# Altium PCB LASERDIODE_FIX.PcbDoc (part 2 of 4)
Units mm, origin at the board's own origin, x right, y up, seen from the top; angles counter-clockwise.
Board outline 85 x 85 mm, 4 copper layers (Top Layer, Mid-Layer 1, Mid-Layer 2, Bottom Layer); 546 components, 363 nets, 1494 pads, 1079 vias.
Unrouted connection lines stored in the file: 1020.
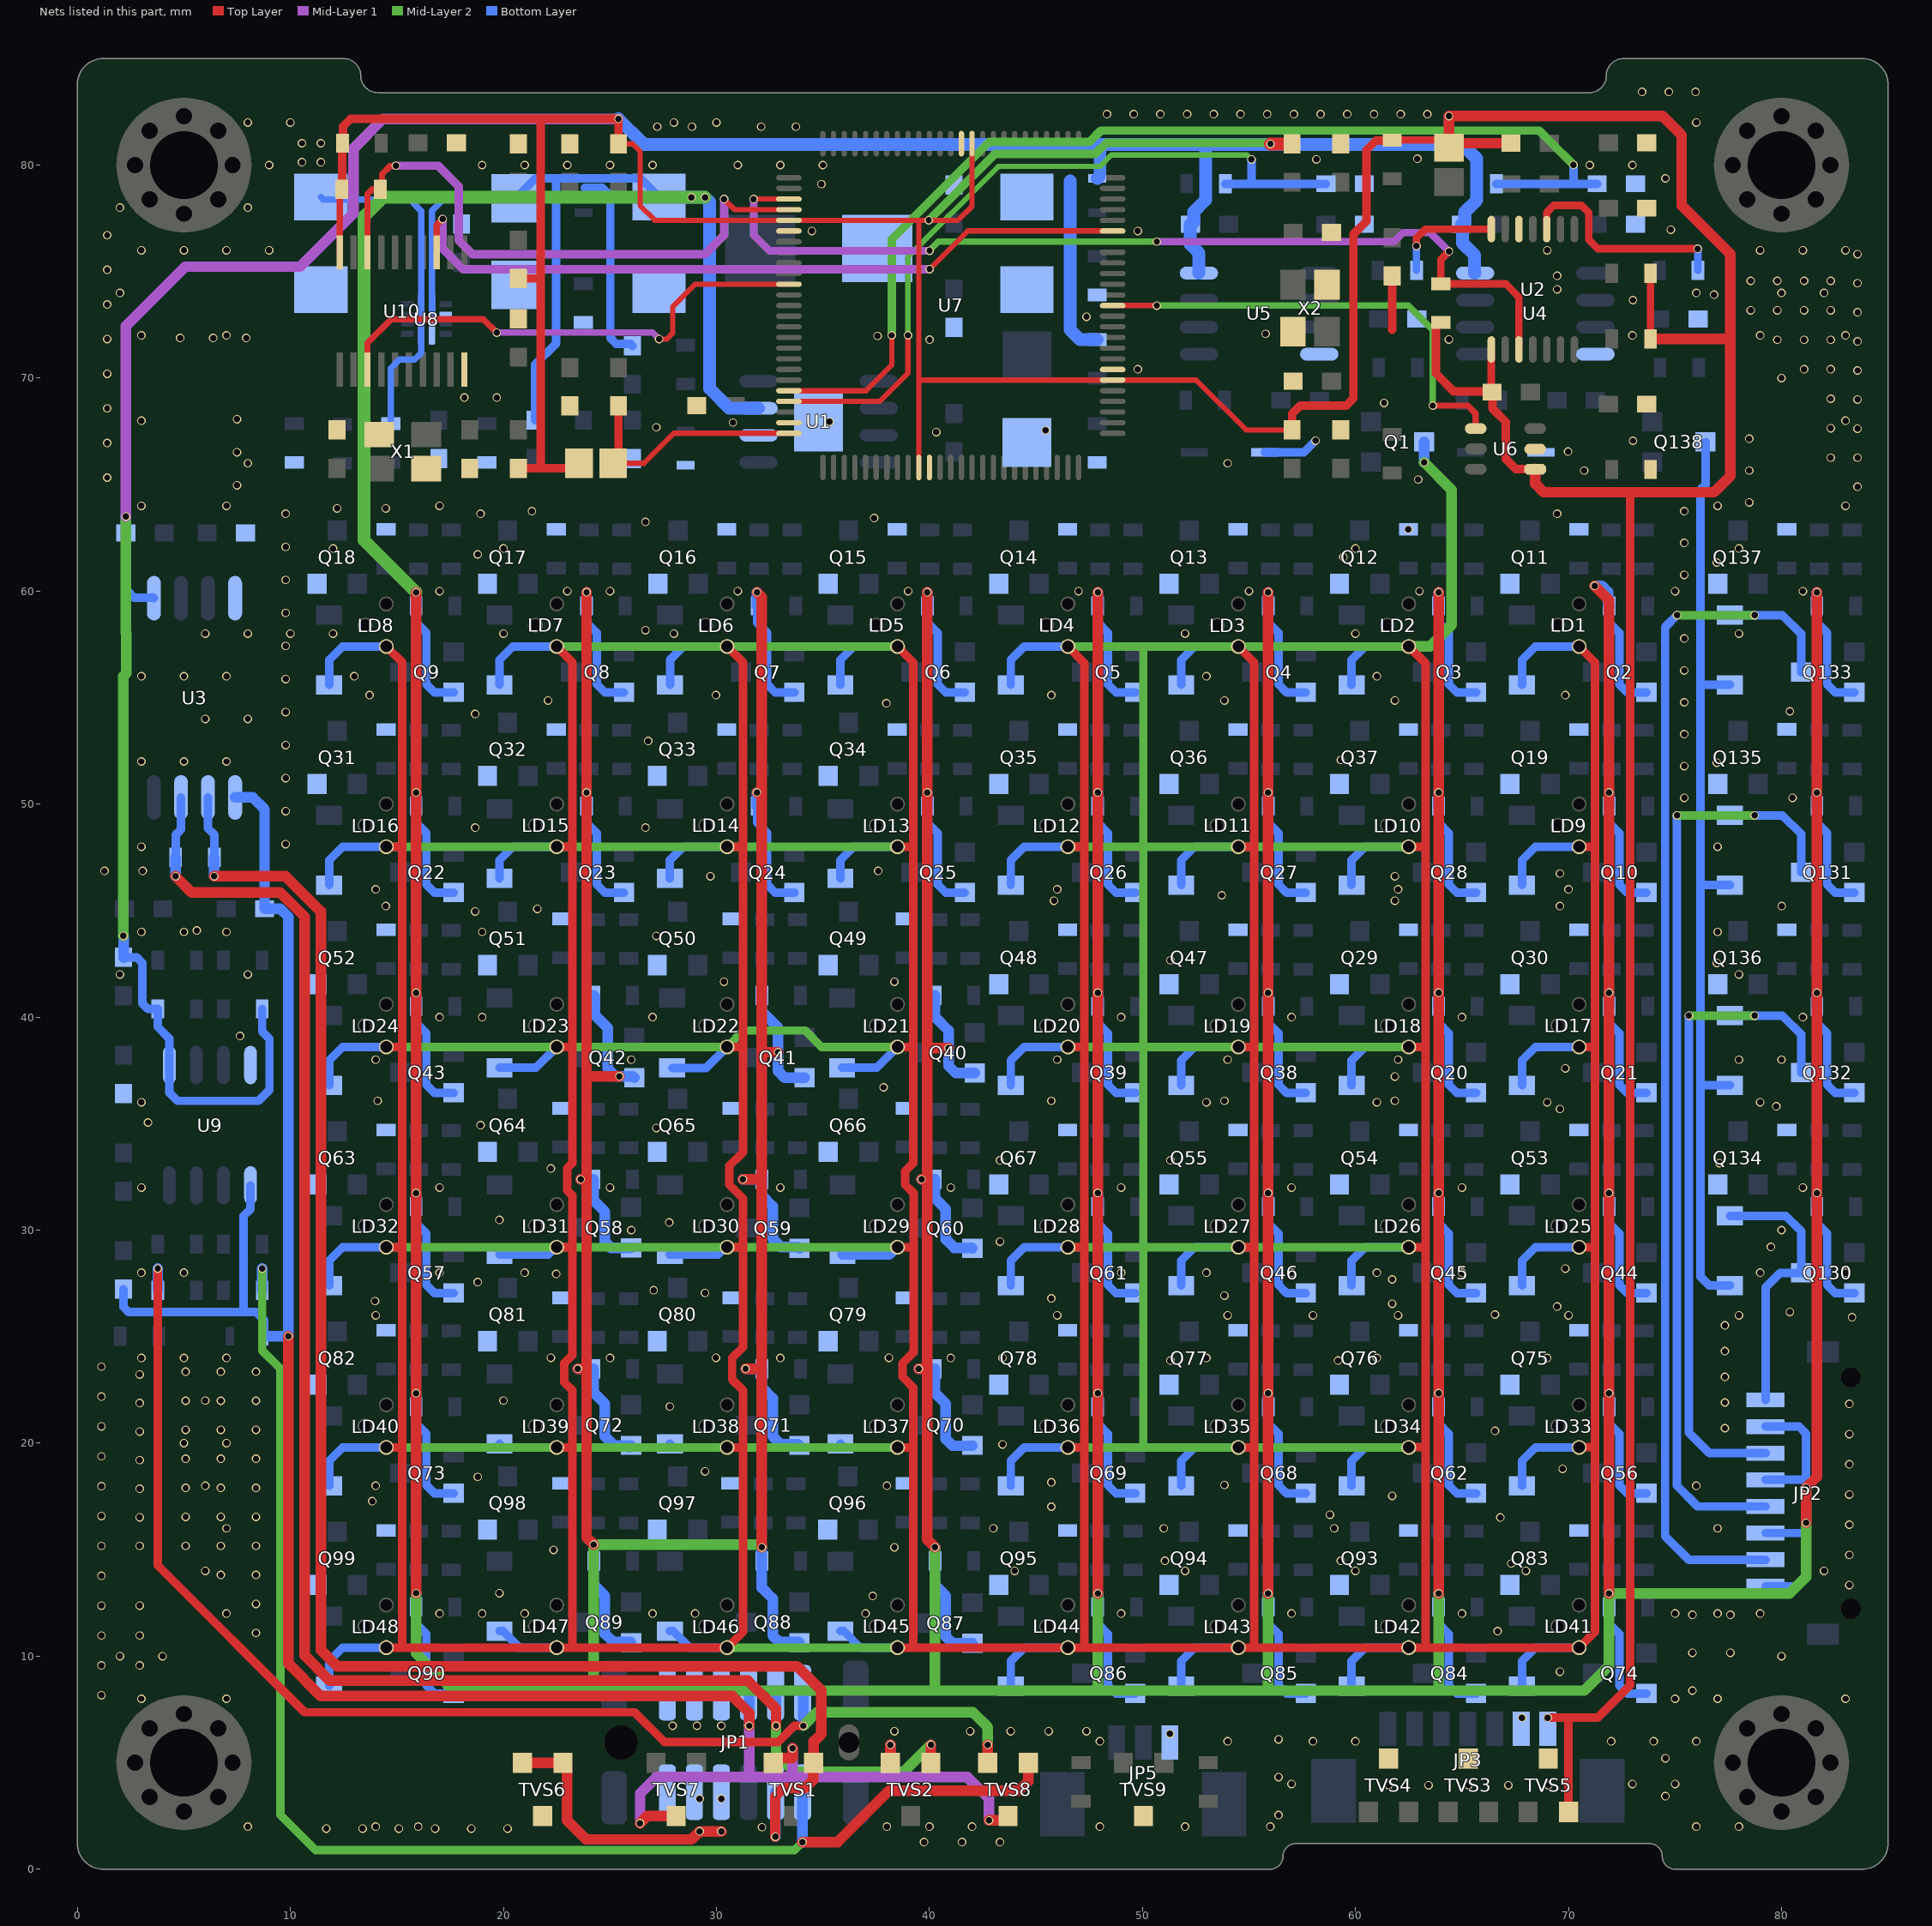
[diagram p4: the nets of this part, all layers, seen from the top]

## Part data
C1 C3 C4 C5 C6 C7 C8 C9 C12 C14 C15 C16 C18 C19 C20 C21 C22 C23 C24 C25 C26 C27 C28 C29 C30 C32 C33 C34 C35 C37 C38 C39 C40 C41 C42 C43 C44 C45 C46 C47 C48 C49 C50 C52 C53 C55 C57 C58 C60 C63 C64 C68: library part CM, "0603"
C2 C10 C11: library part CN_TANT
D1 D2: library part "Diode SMD", "DIODE SCHOTTKY 40V 5A SMA", Code - JEDEC=DO-214-AB, Published=8-Jun-2000, Publisher="Altium Limited", Revision="July-2002: Re-released for DXP Platform."
DIO1 DIO2 DIO3 DIO4 DIO5 DIO6 DIO7 DIO8 DIO9 DIO10 DIO11 DIO12 DIO13 DIO14 DIO15 DIO16 DIO17 DIO18 DIO19 DIO20 DIO21 DIO22 DIO23 DIO24 DIO25 DIO26 DIO27 DIO28 DIO29 DIO30 DIO31 DIO32 DIO33 DIO34 DIO35 DIO36 DIO37 DIO38 DIO39 DIO40 DIO41 DIO42 DIO43 DIO44 DIO45 DIO46 DIO47 DIO48 DIO65 DIO66 DIO67 DIO68: "Default Diode", Code - JEDEC=DO-214-AB, Published=8-Jun-2000, Publisher="Altium Limited", Revision="July-2002: Re-released for DXP Platform."
JP1: "WR-PHD 2.54 mm Dual Socket Header", Manufacturer="W¨¹rth Elektronik eiSos GmbH", partNo=61301221821, ComponentLink1 Description=Manufacturer, ComponentLink1URL=http://www.we-online.com, ComponentLink2 Description=Datasheet, ComponentLink2URL=http://katalog.we-online.de/em/datasheet/6130xx21821.pdf, Created by="Karrer Zheng", Created Date="29 March 2013", NoPins=12
JP2: library part JP8, "WR-PHD 2.54 mm Angled Socket Header", Manufacturer="W¨¹rth Elektronik eiSos GmbH", partNo=613008143121, ComponentLink1 Description=Manufacturer, ComponentLink1URL=http://www.we-online.com, ComponentLink2 Description=Datasheet, ComponentLink2URL=http://katalog.we-online.de/em/datasheet/6130xx143121.pdf, Created by="Karrer Zheng", Created Date="29 March 2013", NoPins=08
JP3: library part JP7, "WR-PHD 2.54 mm Angled Socket Header", Manufacturer="W¨¹rth Elektronik eiSos GmbH", partNo=613007143121, ComponentLink1 Description=Manufacturer, ComponentLink1URL=http://www.we-online.com, ComponentLink2 Description=Datasheet, ComponentLink2URL=http://katalog.we-online.de/em/datasheet/6130xx143121.pdf, Created by="Karrer Zheng", Created Date="29 March 2013", NoPins=07
JP5: library part JP3, "WR-PHD 2.54 mm Angled Socket Header", Manufacturer="W¨¹rth Elektronik eiSos GmbH", partNo=613003143121, ComponentLink1 Description=Manufacturer, ComponentLink1URL=http://www.we-online.com, ComponentLink2 Description=Datasheet, ComponentLink2URL=http://katalog.we-online.de/em/datasheet/6130xx143121.pdf, Created by="Karrer Zheng", Created Date="29 March 2013", NoPins=03
L1: library part INDUCTOR, "SRP7050TA-150M"
L2 L3: library part Inductor, "MLZ1608N100LT000"
LD1 LD2 LD3 LD4 LD5 LD6 LD7 LD8 LD9 LD10 LD11 LD12 LD13 LD14 LD15 LD16 LD17 LD18 LD19 LD20 LD21 LD22 LD23 LD24 LD25 LD26 LD27 LD28 LD29 LD30 LD31 LD32 LD33 LD34 LD35 LD36 LD37 LD38 LD39 LD40 LD41 LD42 LD43 LD44 LD45 LD46 LD47 LD48: library part LD
LED1 LED2 LED3 LED4: library part "LED SMD"
Q1 Q138: library part FET-N
Q2 Q3 Q4 Q5 Q6 Q7 Q8 Q9 Q10 Q20 Q21 Q22 Q23 Q24 Q25 Q26 Q27 Q28 Q38 Q39 Q40 Q41 Q42 Q43 Q44 Q45 Q46 Q56 Q57 Q58 Q59 Q60 Q61 Q62 Q68 Q69 Q70 Q71 Q72 Q73 Q74 Q84 Q85 Q86 Q87 Q88 Q89 Q90 Q130 Q131 Q132 Q133: library part FET-P
Q11 Q12 Q13 Q14 Q15 Q16 Q17 Q18 Q19 Q29 Q30 Q31 Q32 Q33 Q34 Q35 Q36 Q37 Q47 Q48 Q49 Q50 Q51 Q52 Q53 Q54 Q55 Q63 Q64 Q65 Q66 Q67 Q75 Q76 Q77 Q78 Q79 Q80 Q81 Q82 Q83 Q93 Q94 Q95 Q96 Q97 Q98 Q99 Q134 Q135 Q136 Q137: library part 2SC1815, "SOT23-3"
R1 R2 R3 R4 R5 R6 R8 R9 R10 R11 R12 R13 R14 R15 R16 R18 R19 R20 R21 R22 R23 R24 R25 R26 R27 R28 R29 R30 R31 R32 R33 R34 R35 R36 R37 R38 R39 R40 R41 R42 R43 R44 R45 R46 R47 R48 R49 R50 R51 R52 R53 R54 R55 R56 R57 R58 R59 R60 R61 R62 R63 R64 R65 R66 R67 R68 R69 R70 R71 R72 R73 R74 R75 R76 R77 R78 R79 R80 R81 R82 R83 R84 R85 R86 R87 R88 R89 R90 R91 R92 R93 R94 R95 R96 R97 R98 R99 R100 R101 R102 R103 R104 R105 R106 R107 R108 R109 R110 R111 R112 R113 R114 R115 R116 R117 R118 R119 R120 R121 R122 R123 R124 R125 R126 R127 R128 R129 R130 R131 R132 R133 R134 R135 R136 R137 R138 R139 R140 R141 R142 R143 R144 R145 R146 R147 R148 R149 R150 R151 R152 R153 R154 R155 R156 R157 R158 R159 R160 R161 R162 R163 R164 R165 R166 R167 R168 R169 R170 R171 R172 R173 R174 R175 R176 R177 R178 R179 R180 R181 R182 R183 R184 R185 R186 R187 R188 R189 R190 R191 R192 R193 R194 R195 R196 R197 R198 R201 R202 R203 R204 R205 R206 R207 R210 R211 R212 R213 R214 R215 R216 R217 R218 R275 R276 R277 R278 R279 R280 R282 R283 R284 R285 R286 R287 R288 R289 R290 R296 R297 R298 R299 R303 R304 R305 R306 R308 R309 R310 R311 R312 R313 R314 R316 R319 R322: library part Res-SMD, "0603", Manufacturer="Generic Components", Class=Passive, Published=08/06/2000, Publisher="Altium Hobart Technology Centre"
R7: library part Res-SMD, "ERA-3AEB3241V", Manufacturer="Generic Components", Class=Passive, Published=08/06/2000, Publisher="Altium Hobart Technology Centre"
R17: library part Res-SMD, "1206", Manufacturer="Generic Components", Class=Passive, Published=08/06/2000, Publisher="Altium Hobart Technology Centre"
TVS1 TVS2 TVS6: library part S2315, "TVS DIODE 12VWM 19VC SOT23, P/N:  S2312"
TVS3 TVS4 TVS5 TVS7 TVS8 TVS9: library part S2303, "TVS DIODE 5VWM 10.8VC SOT23, P/N:   / S2305"
U1: library part TPS543X, "8SOP"
U2: library part MCP4902, "IC DAC 8BIT V-OUT 14TSSOP"
U3: library part ISO1042, "IC TXRX/ISO FULL 1/1 8SOIC"
U4 U5: library part LM358, "8SOIC"
U6: "TSOT23-6"
U7: "8-bit AVR Microcontroller, 4.5-5.5V, 256KB Flash, 4KB EEPROM, 8KB SRAM, 86 GPIO pins, 100-pin TQFP, Industrial Grade (-40°C to 85°C), Pb-Free", Supplier Part Number 1=ATMEGA2560-16AUR-ND, Supplier 1=Digi-Key
U8: library part TPS259470, "P/N: TPS259470LRPWR"
U10: "IC CAN CONTROLLER W/SPI 20TSSOP, P/N:   / MCP2515-I/ST"
X1 X2: library part XT4, "ECS-80-8-33Q-ADS"

## Via types
v1: diameter 0.4, hole 0.3, Top Layer to Bottom Layer, tented both sides, 1079 vias

## Nets (pads, with @x,y where several pads share a name; then routed paths per layer and width w, separated by ;. In a path a pad name is that pad's centre, name@x,y a point inside that pad or via, vN(x,y) a via of type N, cw(c..) or ccw(c..) an arc to the next point about the centre after c; other vN are vias at no path point)
+5: C9.1 C11.1 C14.1 C20.2 C22.1 C27.2 C30.2 C33.2 C38.1 C39.1 C44.1 C45.1 C53.2 JP3.1 L1.2 L2.2 L3.2 LED1.1 R5.2 R185.1 R218.1 R284.1 R285.1 R288.1 R310.2 R312.2 R316.1 TVS5.3 U2.1 U3.1 U4.8 U5.8 U6.1 U7.10 U7.31 U7.61 U7.80 U9.1 U10.20 | length 404.9
  Top Layer w0.25: C38.1@25.4,80.993 26.068,80.993 26.416,80.645 26.416,78.105 27.115,77.406 U7.80@33.4,77.406 39.497,77.406 ; U7.10@39.5,65.806 39.5,69.85 ; U7.61@42,81.006 42,78.068 41.338,77.406 v1(39.964,77.406) 39.497,77.406 ; C39.1@57.023,67.564 54.864,67.564 52.522,69.906 U7.31@48.6,69.906 39.556,69.906 39.5,69.85 ; 39.497,77.406 39.5,77.403 39.5,69.85
  Top Layer w0.3: U10.20@12.315,75.902 12.315,78.774 R312.2@12.408,78.867 R312.2@12.427,78.886
  Top Layer w0.35: R288.1@12.427,81.007 R288.1@12.446,81.026 ; L2.2@23.313,65.764 L2.2@23.55,66.001 ; R316.1@61.722,81.173 64.026,81.173 L3.2@64.389,80.81 ; U2.1@66.376,71.343 66.376,69.376 C20.2@66.421,69.331 ; R185.1@73.851,71.844 R218.1@73.851,74.911
  Top Layer w0.4: R312.2@12.427,78.886 R288.1@12.427,81.007 ; R288.1@12.446,81.026 12.464,81.044 12.464,81.806 12.827,82.169 21.748,82.169 ; C45.1@20.701,65.764 21.748,65.764 ; C53.2@20.901,74.47 20.701,74.67 C53.2@20.701,74.676 21.717,74.676 ; L2.2@23.313,65.764 21.748,65.764 ; C38.1@25.4,80.993 v1(25.4,82.169) 21.748,82.169 ; C39.1@57.023,67.564 57.023,68.326 57.404,68.707 59.563,68.707 59.902,69.046 59.902,76.751 60.511,77.36 60.511,80.704 60.952,81.145 61.694,81.145 R316.1@61.722,81.173 ; R310.2@64.008,72.606 63.87,72.606 63.77,72.506 63.77,70.215 64.609,69.376 C20.2@66.376,69.376 ; C20.2@66.421,69.331 66.425,69.327 66.425,68.576 67.056,67.945 67.056,66.2 67.519,65.736 U6.1@68.427,65.736 ; v1(69.028,7.112) 71.374,7.112 72.898,8.636 72.898,64.643 ; TVS5.3@70.002,2.687 70.002,7.112 ; 21.748,65.764 21.748,82.169
  Top Layer w0.5: L3.2@64.389,80.81 v1(64.389,82.296) 74.422,82.296 75.311,81.407 75.311,78.105 77.597,75.819 77.597,65.405 76.835,64.643 74.523,64.643 72.898,64.643 68.834,64.643 68.438,65.039 U6.1@68.438,65.725 U6.1@68.427,65.736 ; L3.2@64.605,81.026 C30.2@67.299,81.026 ; R185.1@73.851,71.844 77.597,71.844
  Top Layer w0.6: v1(56.007,80.993) C44.1@57.023,80.993
  Mid-Layer 1 w0.5: v1(2.275,63.5) 2.275,72.451 5.055,75.231 10.461,75.231 12.954,77.724 12.954,80.772 14.351,82.169 v1(25.4,82.169)
  Mid-Layer 2 w0.4: v1(39.964,77.406) 43.076,80.518 47.782,80.518 48.315,81.051 55.949,81.051 v1(56.007,80.993)
  Mid-Layer 2 w0.5: v1(2.159,43.815) 2.159,56.007 2.286,56.134 2.286,58.039 2.275,58.05 v1(2.275,63.5)
  Bottom Layer w0.4: C14.1@2.159,42.805 2.165,42.799 2.794,42.799 3.048,42.545 3.048,40.64 3.302,40.386 R285.1@3.772,40.386 3.772,39.535 4.318,38.989 U9.1@4.318,37.75 4.318,36.449 4.699,36.068 8.509,36.068 9.017,36.576 9.017,38.978 8.674,39.321 R284.1@8.674,40.386 ; C22.1@2.275,62.736 2.275,60.082 2.667,59.69 3.569,59.69 U3.1@3.593,59.666
  Bottom Layer w0.5: v1(2.159,43.815) 2.165,43.809 C14.1@2.165,42.799 ; C22.1@2.275,62.736 v1(2.275,63.5) ; LED1.1@47.879,79.372 47.956,79.372 48.006,79.422 48.006,79.629 ; 64.389,80.963 v1(64.389,82.296)
  Bottom Layer w0.6: v1(25.4,82.169) 26.606,80.963 48.004,80.963 ; 46.609,79.248 46.609,72.263 47.065,71.807 R5.2@47.874,71.807 ; LED1.1@47.879,79.372 LED1.1@47.904,79.372 ; 48.004,80.518 48.004,80.963 ; 48.006,79.629 48.006,80.518 ; U5.8@52.649,74.93 52.649,75.875 52.241,76.283 52.241,77.206 C33.2@52.25,77.216 52.3,77.216 52.4,77.316 52.4,77.8 52.959,78.359 52.959,80.899 ; U4.8@65.615,74.93 65.584,74.93 65.584,75.779 65.024,76.339 65.024,77.17 C27.2@64.978,77.216 65.028,77.216 65.128,77.316 65.128,77.783 65.687,78.342 65.687,80.3 65.024,80.963 64.389,80.963 48.004,80.963
+12: C1.2 C6.1 C10.1 D1.2 JP2.1 JP2.3 JP2.5 JP2.7 LED3.1 Q2.3 Q3.3 Q4.3 Q5.3 Q6.3 Q7.3 Q8.3 Q9.3 Q10.3 Q20.3 Q21.3 Q22.3 Q23.3 Q24.3 Q25.3 Q26.3 Q27.3 Q28.3 Q38.3 Q39.3 Q40.3 Q41.3 Q42.3 Q43.3 Q44.3 Q45.3 Q46.3 Q56.3 Q57.3 Q58.3 Q59.3 Q60.3 Q61.3 Q62.3 Q68.3 Q69.3 Q70.3 Q71.3 Q72.3 Q73.3 Q74.3 Q84.3 Q85.3 Q86.3 Q87.3 Q88.3 Q89.3 Q90.3 Q130.3 Q131.3 Q132.3 Q133.3 R8.1 R9.1 R10.1 R11.1 R18.1 R19.1 R20.1 R21.1 R22.1 R23.1 R24.1 R25.1 R26.1 R45.1 R46.1 R47.1 R48.1 R49.1 R50.1 R51.1 R52.1 R53.1 R72.1 R73.1 R74.1 R75.1 R76.1 R77.1 R78.1 R79.1 R80.1 R100.1 R101.1 R102.1 R103.1 R104.1 R147.1 R148.1 R149.1 R150.1 R151.1 R152.1 R153.1 R154.1 R155.1 R183.1 R184.1 R186.1 R188.1 R189.1 R190.1 R191.1 U1.7 U8.6 | length 938.7
  Top Layer w0.5: v1(15.901,12.954) v1(15.901,22.344) v1(15.901,31.744) v1(15.901,41.144) v1(15.901,50.544) v1(15.901,59.944) ; v1(23.495,23.495) 23.774,23.495 23.901,23.368 ; v1(23.622,32.385) 23.774,32.385 23.901,32.512 ; v1(23.901,59.944) v1(23.901,50.544) 23.901,37.211 ; v1(24.236,15.24) 23.901,15.575 23.901,23.368 ; v1(25.445,37.222) 23.912,37.222 23.901,37.211 ; v1(31.242,32.385) 32.131,32.385 ; v1(31.369,23.495) 32.131,23.495 ; v1(31.901,50.544) 32.129,50.544 32.131,50.546 ; v1(31.901,59.944) 32.131,59.714 32.131,50.546 ; v1(32.131,15.113) 32.131,23.495 ; v1(32.893,38.354) 32.131,38.354 ; v1(39.497,23.495) 39.901,23.495 ; v1(39.624,32.385) 39.901,32.385 ; v1(39.901,59.944) v1(39.901,50.544) 39.901,38.481 ; v1(40.259,15.113) 39.901,15.471 39.901,23.495 ; v1(40.894,38.544) 39.964,38.544 39.901,38.481 ; v1(47.901,12.944) v1(47.901,22.344) v1(47.901,31.744) v1(47.901,41.144) v1(47.901,50.544) v1(47.901,59.944) ; v1(55.901,12.944) v1(55.901,22.344) v1(55.901,31.744) v1(55.901,41.144) v1(55.901,50.544) v1(55.901,59.944) ; v1(63.901,12.944) v1(63.901,22.344) v1(63.901,31.744) v1(63.901,41.144) v1(63.901,50.544) v1(63.901,59.944) ; v1(71.227,60.25) 71.901,59.576 v1(71.901,50.544) v1(71.901,41.144) v1(71.901,31.744) v1(71.901,22.344) v1(71.901,12.944) ; v1(81.153,16.256) v1(81.153,17.907) 81.661,18.415 v1(81.661,41.144) v1(81.661,59.944) ; 23.901,23.368 23.901,32.512 ; 23.901,32.512 23.901,37.211 ; 32.131,23.495 32.131,32.385 ; 32.131,32.385 32.131,38.354 ; 32.131,38.354 32.131,50.546 ; 39.901,23.495 39.901,32.385 ; 39.901,32.385 39.901,38.481
  Mid-Layer 2 w0.5: v1(15.901,12.954) 15.901,10.134 17.653,8.382 24.257,8.382 ; v1(32.131,15.113) 32.004,15.24 v1(24.236,15.24) 24.236,8.403 24.257,8.382 ; v1(40.259,15.113) 40.259,8.382 ; v1(47.901,12.944) 47.901,8.404 47.879,8.382 ; v1(55.901,12.944) 55.901,8.403 55.88,8.382 ; v1(63.901,12.944) 63.901,8.489 64.008,8.382 ; v1(81.153,17.907) v1(81.153,16.256) 81.153,13.716 80.381,12.944 v1(71.901,12.944) 71.901,9.544 70.739,8.382 64.008,8.382 ; 24.257,8.382 40.259,8.382 ; 40.259,8.382 47.879,8.382 ; 47.879,8.382 55.88,8.382 ; 55.88,8.382 64.008,8.382
  Mid-Layer 2 w0.6: v1(15.901,59.944) 13.462,62.383 13.462,77.597 14.351,78.486 v1(28.829,78.486) v1(29.464,78.486)
  Bottom Layer w0.3: U8.6@16.637,72.771 16.637,77.851 17.223,78.437 D1.2@20.574,78.437
  Bottom Layer w0.4: R186.1@15.906,12.304 15.906,11.516 16.383,11.039 16.383,8.626 16.764,8.245 Q90.3@17.66,8.245 ; R150.1@15.906,21.704 15.906,20.916 16.383,20.439 16.383,18.026 16.764,17.645 Q73.3@17.66,17.645 ; R100.1@15.906,31.104 15.906,30.316 16.383,29.839 16.383,27.426 16.764,27.045 Q57.3@17.66,27.045 ; R77.1@15.906,40.504 15.906,39.716 16.383,39.239 16.383,36.826 16.764,36.445 Q43.3@17.66,36.445 ; R47.1@15.906,49.904 15.906,49.116 16.383,48.639 16.383,46.226 16.764,45.845 Q22.3@17.66,45.845 ; R25.1@15.906,59.304 15.906,58.516 16.383,58.039 16.383,55.626 16.764,55.245 Q9.3@17.66,55.245 ; D1.2@20.574,78.437 21.509,79.372 LED3.1@23.754,79.372 26.432,79.372 C10.1@27.305,78.499 ; C1.2@21.488,68.02 21.488,70.637 22.479,71.628 22.479,79.219 ; 23.812,78.93 24.647,78.93 25.019,78.559 25.019,71.882 25.295,71.606 25.966,71.606 C6.1@26.06,71.512 ; R48.1@23.906,49.904 23.906,49.116 24.383,48.639 24.383,46.226 24.764,45.845 Q23.3@25.66,45.845 ; R24.1@23.906,59.304 23.906,58.516 24.383,58.039 24.383,55.626 24.764,55.245 Q8.3@25.66,55.245 ; R49.1@31.906,49.904 31.906,49.116 32.383,48.639 32.383,46.226 32.764,45.845 Q24.3@33.66,45.845 ; R23.1@31.906,59.304 31.906,58.516 32.383,58.039 32.383,55.626 32.764,55.245 Q7.3@33.66,55.245 ; R50.1@39.906,49.904 39.906,49.116 40.383,48.639 40.383,46.226 40.764,45.845 Q25.3@41.66,45.845 ; R22.1@39.906,59.304 39.906,58.516 40.383,58.039 40.383,55.626 40.764,55.245 Q6.3@41.66,55.245 ; R191.1@47.906,12.304 47.906,11.516 48.383,11.039 48.383,8.626 48.764,8.245 Q86.3@49.66,8.245 ; R153.1@47.906,21.704 47.906,20.916 48.383,20.439 48.383,18.026 48.764,17.645 Q69.3@49.66,17.645 ; R104.1@47.906,31.104 47.906,30.316 48.383,29.839 48.383,27.426 48.764,27.045 Q61.3@49.66,27.045 ; R73.1@47.906,40.504 47.906,39.716 48.383,39.239 48.383,36.826 48.764,36.445 Q39.3@49.66,36.445 ; R51.1@47.906,49.904 47.906,49.116 48.383,48.639 48.383,46.226 48.764,45.845 Q26.3@49.66,45.845 ; R21.1@47.906,59.304 47.906,58.516 48.383,58.039 48.383,55.626 48.764,55.245 Q5.3@49.66,55.245 ; R188.1@55.906,12.304 55.906,11.516 56.383,11.039 56.383,8.626 56.764,8.245 Q85.3@57.66,8.245 ; R148.1@55.906,21.704 55.906,20.916 56.383,20.439 56.383,18.026 56.764,17.645 Q68.3@57.66,17.645 ; R80.1@55.906,31.104 55.906,30.316 56.383,29.839 56.383,27.426 56.764,27.045 Q46.3@57.66,27.045 ; R72.1@55.906,40.504 55.906,39.716 56.383,39.239 56.383,36.826 56.764,36.445 Q38.3@57.66,36.445 ; R52.1@55.906,49.904 55.906,49.116 56.383,48.639 56.383,46.226 56.764,45.845 Q27.3@57.66,45.845 ; R20.1@55.906,59.304 55.906,58.516 56.383,58.039 56.383,55.626 56.764,55.245 Q4.3@57.66,55.245 ; R190.1@63.906,12.304 63.906,11.516 64.383,11.039 64.383,8.626 64.764,8.245 Q84.3@65.66,8.245 ; R152.1@63.906,21.704 63.906,20.916 64.383,20.439 64.383,18.026 64.764,17.645 Q62.3@65.66,17.645 ; R79.1@63.906,31.104 63.906,30.316 64.383,29.839 64.383,27.426 64.764,27.045 Q45.3@65.66,27.045 ; R45.1@63.906,40.504 63.906,39.716 64.383,39.239 64.383,36.826 64.764,36.445 Q20.3@65.66,36.445 ; R53.1@63.906,49.904 63.906,49.116 64.383,48.639 64.383,46.226 64.764,45.845 Q28.3@65.66,45.845 ; R19.1@63.906,59.304 63.906,58.516 64.383,58.039 64.383,55.626 64.764,55.245 Q3.3@65.66,55.245 ; R155.1@71.906,12.304 71.906,11.516 72.383,11.039 72.383,8.626 72.764,8.245 Q74.3@73.66,8.245 ; R147.1@71.906,21.704 71.906,20.916 72.383,20.439 72.383,18.026 72.764,17.645 Q56.3@73.66,17.645 ; R78.1@71.906,31.104 71.906,30.316 72.383,29.839 72.383,27.426 72.764,27.045 Q44.3@73.66,27.045 ; R46.1@71.906,40.504 71.906,39.716 72.383,39.239 72.383,36.826 72.764,36.445 Q21.3@73.66,36.445 ; R26.1@71.906,49.904 71.906,49.116 72.383,48.639 72.383,46.226 72.764,45.845 Q10.3@73.66,45.845 ; R18.1@71.906,59.304 71.906,58.516 72.383,58.039 72.383,55.626 72.764,55.245 Q2.3@73.66,55.245 ; JP2.1@79.247,13.278 80.715,13.278 81.153,13.716 81.153,15.875 ; JP2.3@79.247,15.778 81.056,15.778 81.153,15.875 ; JP2.5@79.247,18.278 81.036,18.278 81.153,18.161 ; JP2.7@79.247,20.778 80.822,20.778 81.153,20.447 81.153,18.161 ; R11.1@81.666,31.104 81.666,30.316 82.143,29.839 82.143,27.426 82.524,27.045 Q130.3@83.42,27.045 ; R8.1@81.666,40.504 81.666,39.716 82.143,39.239 82.143,36.826 82.524,36.445 Q132.3@83.42,36.445 ; R10.1@81.666,49.905 81.666,49.117 82.143,48.64 82.143,46.227 82.524,45.846 Q131.3@83.42,45.846 ; R9.1@81.666,59.304 81.666,58.516 82.143,58.039 82.143,55.626 82.524,55.245 Q133.3@83.42,55.245 ; 81.153,15.875 v1(81.153,16.256) v1(81.153,17.907) 81.153,18.161
  Bottom Layer w0.5: v1(15.901,12.954) R186.1@15.901,12.309 R186.1@15.906,12.304 ; v1(15.901,22.344) R150.1@15.901,21.709 R150.1@15.906,21.704 ; v1(15.901,31.744) R100.1@15.901,31.109 R100.1@15.906,31.104 ; v1(15.901,41.144) R77.1@15.901,40.509 R77.1@15.906,40.504 ; v1(15.901,50.544) R47.1@15.901,49.909 R47.1@15.906,49.904 ; v1(15.901,59.944) R25.1@15.901,59.309 R25.1@15.906,59.304 ; v1(23.495,23.495) R154.1@24.236,23.495 24.236,22.373 24.765,21.844 24.765,20.32 25.192,19.893 Q72.3@25.995,19.893 Q72.3@25.914,19.812 ; v1(23.622,32.385) R101.1@24.236,32.385 24.236,31.39 24.765,30.861 24.765,29.464 25.059,29.17 Q58.3@25.995,29.17 ; v1(23.901,50.544) R48.1@23.901,49.909 R48.1@23.906,49.904 ; v1(23.901,59.944) R24.1@23.901,59.309 R24.1@23.906,59.304 ; v1(24.236,15.24) R184.1@24.236,14.478 24.236,13.356 24.765,12.827 24.765,11.049 25.146,10.668 25.964,10.668 Q89.3@25.995,10.637 ; R76.1@24.236,41.021 24.286,40.971 24.286,40.103 24.892,39.497 24.892,37.592 25.273,37.211 26.091,37.211 Q42.3@26.148,37.155 ; v1(31.242,32.385) R102.1@32.131,32.385 32.131,31.623 32.639,31.115 32.639,29.591 33.02,29.21 33.828,29.21 Q59.3@33.889,29.149 ; v1(31.369,23.495) R149.1@32.131,23.495 32.131,22.606 32.639,22.098 32.639,20.32 33.02,19.939 33.843,19.939 Q71.3@33.889,19.893 ; v1(31.901,50.544) R49.1@31.901,49.909 R49.1@31.906,49.904 ; v1(31.901,59.944) R23.1@31.901,59.309 R23.1@31.906,59.304 ; v1(32.131,15.113) R189.1@32.131,14.478 32.131,13.208 32.639,12.7 32.639,10.961 32.932,10.668 33.858,10.668 Q88.3@33.889,10.637 ; R75.1@32.131,41.021 32.131,40.259 32.893,39.497 v1(32.893,38.354) 32.893,37.465 33.208,37.15 Q41.3@34.143,37.15 ; v1(39.497,23.495) R151.1@40.258,23.495 40.258,22.353 40.767,21.844 40.767,20.193 41.085,19.875 41.999,19.875 Q70.3@42.017,19.893 ; v1(39.624,32.385) R103.1@40.258,32.385 40.258,31.497 40.767,30.988 40.767,29.572 41.167,29.173 41.993,29.173 Q60.3@42.017,29.149 ; v1(39.901,50.544) R50.1@39.901,49.909 R50.1@39.906,49.904 ; v1(39.901,59.944) R22.1@39.901,59.309 R22.1@39.906,59.304 ; R74.1@40.258,41.021 40.258,40.006 40.894,39.37 v1(40.894,38.544) 40.894,37.719 41.243,37.37 Q40.3@42.125,37.37 ; v1(40.259,15.113) 40.259,14.479 R183.1@40.258,14.478 40.258,13.336 40.767,12.827 40.767,10.922 41.085,10.604 42.014,10.604 Q87.3@42.017,10.607 ; v1(47.901,12.944) R191.1@47.901,12.309 R191.1@47.906,12.304 ; v1(47.901,22.344) R153.1@47.901,21.709 R153.1@47.906,21.704 ; v1(47.901,31.744) R104.1@47.901,31.109 R104.1@47.906,31.104 ; v1(47.901,41.144) R73.1@47.901,40.509 R73.1@47.906,40.504 ; v1(47.901,50.544) R51.1@47.901,49.909 R51.1@47.906,49.904 ; v1(47.901,59.944) R21.1@47.901,59.309 R21.1@47.906,59.304 ; v1(55.901,12.944) R188.1@55.901,12.309 R188.1@55.906,12.304 ; v1(55.901,22.344) R148.1@55.901,21.709 R148.1@55.906,21.704 ; v1(55.901,31.744) R80.1@55.901,31.109 R80.1@55.906,31.104 ; v1(55.901,41.144) R72.1@55.901,40.509 R72.1@55.906,40.504 ; v1(55.901,50.544) R52.1@55.901,49.909 R52.1@55.906,49.904 ; v1(55.901,59.944) R20.1@55.901,59.309 R20.1@55.906,59.304 ; v1(63.901,12.944) R190.1@63.901,12.309 R190.1@63.906,12.304 ; v1(63.901,22.344) R152.1@63.901,21.709 R152.1@63.906,21.704 ; v1(63.901,31.744) R79.1@63.901,31.109 R79.1@63.906,31.104 ; v1(63.901,41.144) R45.1@63.901,40.509 R45.1@63.906,40.504 ; v1(63.901,50.544) R53.1@63.901,49.909 R53.1@63.906,49.904 ; v1(63.901,59.944) R19.1@63.901,59.309 R19.1@63.906,59.304 ; v1(71.227,60.25) 71.558,60.25 71.851,59.957 71.851,59.359 R18.1@71.901,59.309 R18.1@71.906,59.304 ; v1(71.901,12.944) R155.1@71.901,12.309 R155.1@71.906,12.304 ; v1(71.901,22.344) R147.1@71.901,21.709 R147.1@71.906,21.704 ; v1(71.901,31.744) R78.1@71.901,31.109 R78.1@71.906,31.104 ; v1(71.901,41.144) R46.1@71.901,40.509 R46.1@71.906,40.504 ; v1(71.901,50.544) R26.1@71.901,49.909 R26.1@71.906,49.904 ; v1(81.661,31.744) R11.1@81.661,31.109 R11.1@81.666,31.104 ; v1(81.661,41.144) R8.1@81.661,40.509 R8.1@81.666,40.504 ; v1(81.661,50.545) R10.1@81.661,49.91 R10.1@81.666,49.905 ; v1(81.661,59.944) R9.1@81.661,59.309 R9.1@81.666,59.304
  Bottom Layer w0.6: C10.1@27.305,78.499 27.318,78.486 v1(28.829,78.486) v1(29.464,78.486) 29.683,78.267 29.683,69.504 30.607,68.58 U1.7@31.973,68.58
+12_AUX: C2.1 JP1.7 JP1.8 JP1.9 R1.2 TVS6.1 TVS6.3 U8.5 | length 28.4
  Top Layer w0.5: TVS6.3@20.894,4.989 TVS6.1@22.794,4.989 22.987,4.796 22.987,2.286 23.876,1.397 28.829,1.397 v1(29.21,1.778) v1(30.226,1.778)
  Bottom Layer w0.3: C2.1@11.43,78.499 11.541,78.388 15.592,78.388 16.137,77.843 U8.5@16.137,72.771 16.137,71.173 15.83,70.866 15.113,70.866 14.706,70.459 R1.2@14.706,67.856
  other v1: 29.21,3.302 30.226,3.302 10.541,80.137 11.43,80.137 10.541,81.026 11.43,81.026
AVCC: C52.2 L2.1 U7.100 | length 11.6
  Top Layer w0.25: L2.1@25.15,66.001 26.596,66.001 28.001,67.406 U7.100@33.4,67.406
  Top Layer w0.4: L2.1@25.15,66.001 25.4,66.251 C52.2@25.4,68.696
BUS_SCL: JP1.12 R289.2 TVS8.1 | length 67.4
  Top Layer w0.5: v1(34.042,1.27) 35.687,1.27 38.1,3.683 44.196,3.683 44.639,4.126 TVS8.1@44.638,4.989 TVS8.1@44.638,4.989
  Mid-Layer 2 w0.4: v1(8.674,28.194) 8.674,24.346 9.525,23.495 9.525,2.54 11.176,0.889 33.661,0.889 v1(34.042,1.27)
  Bottom Layer w0.5: R289.2@8.674,27.178 v1(8.674,28.194) ; v1@34.042,1.249 v1(34.042,1.27) 34.042,3.612 JP1.12@34.043,3.613
BUS_SDA: JP1.1 R287.2 TVS8.3 | length 61.5
  Top Layer w0.4: v1(3.772,28.194) 3.772,14.262 10.668,7.366 26.162,7.366 27.559,5.969 32.893,5.969 33.655,6.731 v1(34.078,6.731)
  Top Layer w0.5: TVS8.3@42.738,4.989 v1(42.738,5.842)
  Mid-Layer 2 w0.5: v1(34.078,6.731) 34.713,7.366 42.037,7.366 42.738,6.665 v1(42.738,5.842)
  Bottom Layer w0.5: R287.2@3.772,27.178 v1(3.772,28.194) ; JP1.1@34.043,8.283 34.078,8.248 v1(34.078,6.731)
CAN_CS: R312.1 U7.79 U10.18 | length 28.9
  Top Layer w0.25: v1(30.359,78.406) 30.859,77.906 U7.79@33.4,77.906
  Top Layer w0.3: U10.18@13.615,75.902 13.615,78.639 13.843,78.867 R312.1@14.224,78.867 14.3,78.943 14.3,79.578 14.672,79.95 14.927,79.95 v1(14.946,79.969)
  Mid-Layer 1 w0.4: v1(14.946,79.969) 16.932,79.969 17.907,78.994 17.907,76.454 18.542,75.819 29.464,75.819 30.359,76.714 v1(30.359,78.406)
CAN_INT: U7.45 U10.13 | length 35.7
  Top Layer w0.25: v1(40.005,75.112) 41.799,76.906 U7.45@48.6,76.906
  Top Layer w0.3: U10.13@16.865,75.902 16.865,77.19 v1(17.145,77.47)
  Mid-Layer 1 w0.4: v1(17.145,77.47) 17.145,76.073 18.106,75.112 v1(40.005,75.112)
CANH: JP1.2 R280.1 TVS2.1 U3.7 | length 81.2
  Top Layer w0.5: v1(4.609,46.609) 5.371,45.847 9.525,45.847 10.668,44.704 10.668,10.033 11.852,8.849 31.481,8.849 32.798,7.532 v1(32.798,6.731) ; TVS2.1@40.066,4.989 v1(40.066,5.842)
  Mid-Layer 2 w0.5: v1(32.798,6.731) 32.798,5.429 33.655,4.572 38.796,4.572 v1(40.066,5.842)
  Bottom Layer w0.4: R280.1@4.609,47.498 4.609,48.551 4.863,48.805 U3.7@4.863,50.316
  Bottom Layer w0.5: v1(4.609,46.609) R280.1@4.609,47.498 ; JP1.2@32.773,8.283 32.798,8.258 v1(32.798,6.731)
CANL: JP1.11 R280.2 TVS1.1 U3.6 | length 78.9
  Top Layer w0.5: v1(6.425,46.609) 9.779,46.609 11.43,44.958 11.43,10.287 12.192,9.525 33.782,9.525 34.925,8.382 34.925,6.355 34.563,5.992 TVS1.1@34.563,4.989 34.544,4.97 34.544,4.191 34.163,3.81 33.147,3.81 32.757,3.42 v1@32.757,1.533
  Bottom Layer w0.4: U3.6@6.133,50.316 6.133,48.858 6.425,48.566 R280.2@6.425,47.498
  Bottom Layer w0.5: v1(6.425,46.609) R280.2@6.425,47.498 ; v1(32.766,1.524) 32.766,3.606 JP1.11@32.773,3.613
CLKOUT: U7.86 U10.3 | length 23.7
  Top Layer w0.25: v1(27.305,71.833) 27.667,71.833 27.947,72.113 27.947,73.35 29.003,74.406 U7.86@33.4,74.406
  Top Layer w0.3: U10.3@13.615,70.402 13.615,71.654 14.732,72.771 19.05,72.771 v1(19.685,72.136)
  Mid-Layer 1 w0.3: v1(19.685,72.136) 27.002,72.136 v1(27.305,71.833)
DAC_CS: R310.1 U2.3 U7.78 | length 45.1
  Top Layer w0.25: v1(31.75,78.406) U7.78@33.4,78.406
  Top Layer w0.35: v1(64.389,75.946) 64.008,75.565 R310.1@64.008,74.422 67.056,74.422 67.676,73.802 U2.3@67.676,71.343
  Mid-Layer 1 w0.35: v1(31.75,78.406) 31.75,76.708 32.481,75.977 v1@39.993,75.977 ; v1(50.673,76.406) 61.801,76.406 62.23,76.835 63.5,76.835 v1(64.389,75.946)
  Mid-Layer 2 w0.3: v1@39.993,75.977 40.422,76.406 v1(50.673,76.406)
  other v1: 40.005,75.977
DAC_DRV_EXT: R309.1 U2.10 | length 10.6
  Top Layer w0.35: U2.10@68.976,76.993 68.976,77.779 69.302,78.105 70.612,78.105 70.95,77.767 70.95,76.497 71.374,76.073 v1@76.026,76.073
  Bottom Layer w0.35: R309.1@76.073,75.057 v1(76.073,76.073)
DAC_DRV_INT: R99.1 U2.14 | length 5.2
  Top Layer w0.35: v1(62.865,76.2) 62.865,76.581 63.277,76.993 U2.14@66.376,76.993
  Bottom Layer w0.35: R99.1@62.865,75.057 v1(62.865,76.2)
DONE: U6.4 U7.38 | length 21.9
  Top Layer w0.25: U7.38@48.6,73.406 v1(50.673,73.406)
  Top Layer w0.3: v1(63.627,68.707) 65.278,68.707 65.644,68.341 U6.4@65.644,67.63
  Mid-Layer 2 w0.3: v1(50.673,73.406) 62.484,73.406 63.627,72.263 v1(63.627,68.707)
GND_AUX: C2.2 C3.1 C4.1 C7.2 C8.2 C10.2 C11.2 C12.2 C15.2 C16.1 C18.1 C21.1 C24.1 C26.2 C29.1 C32.2 C34.1 C35.1 C41.2 C42.2 C46.2 C47.2 C48.2 C49.2 C50.2 C55.1 C57.1 C58.1 C60.2 C63.1 C64.1 C68.1 D1.1 D2.1 JP1.4 JP1.5 JP1.6 JP3.2 JP5.1 LED2.2 Q11.2 Q12.2 Q13.2 Q14.2 Q15.2 Q16.2 Q17.2 Q18.2 Q19.2 Q29.2 Q30.2 Q31.2 Q32.2 Q33.2 Q34.2 Q35.2 Q36.2 Q37.2 Q47.2 Q48.2 Q49.2 Q50.2 Q51.2 Q52.2 Q53.2 Q54.2 Q55.2 Q63.2 Q64.2 Q65.2 Q66.2 Q67.2 Q75.2 Q76.2 Q77.2 Q78.2 Q79.2 Q80.2 Q81.2 Q82.2 Q83.2 Q93.2 Q94.2 Q95.2 Q96.2 Q97.2 Q98.2 Q99.2 Q134.2 Q135.2 Q136.2 Q137.2 R3.1 R4.1 R6.2 R7.1 R17.1 R105.2 R111.2 R117.2 R118.2 R119.2 R120.2 R121.2 R122.2 R123.2 R124.2 R125.2 R126.2 R127.2 R128.2 R129.2 R130.2 R131.2 R132.2 R133.2 R134.2 R135.2 R136.2 R137.2 R138.2 R139.2 R140.2 R141.2 R142.2 R143.2 R144.2 R145.2 R146.2 R174.2 R175.2 R176.2 R177.2 R178.2 R179.2 R180.2 R181.2 R182.2 R210.2 R211.2 R212.2 R213.2 R214.2 R215.2 R216.2 R217.2 R296.2 R297.2 R298.2 R299.2 R306.1 R322.1 TVS3.2 TVS4.2 TVS5.2 TVS6.2 TVS9.2 U1.6 U1.9 U2.12 U3.4 U4.4 U5.4 U6.2 U7.11 U7.32 U7.62 U7.81 U7.99 U8.8 U9.4 U10.10 X1.2 X1.4 X2.2 X2.4 | length 5.1
  Top Layer w0.4: 61.722,72.274 C32.2@61.722,74.792
  Bottom Layer w0.4: R17.1@55.741,66.511 57.574,66.511 v1(58.125,67.062)
  other v1: 39.751,1.27 41.529,1.27 43.307,1.27 11.684,1.905 13.386,1.905 15.088,1.905 16.789,1.905 18.491,1.905 20.193,1.905 32.14,1.97 8,2 14,2 16,2 38,2 40,2 42,2 48,2 52,2 56,2 76,2 78,2 56.388,2.54 74.549,3.429 61.552,3.937 63.427,3.937 65.302,3.937 67.177,3.937 69.052,3.937 57,4 73,4 75,4 56.388,4.318 74.549,5.207 48,6 54,6 58,6 60,6 72,6 74,6 76,6 56.388,6.096 51.288,6.35 38.354,6.477 41.91,6.477 43.815,6.477 45.593,6.477 47.371,6.477 27.94,6.731 29.083,6.731 30.226,6.731 67.818,7.112 3,8 7,8 75,8 77,8 83,8 1.127,8.163 75.819,8.382 69.596,9.271 1.127,9.566 2.921,9.566 2,10 4,10 80,10 75.819,10.16 77.597,10.16 1.127,10.968 2.921,10.968 8.382,11.09 66.675,11.176 75.819,11.938 77.597,11.938 7,12 17,12 19,12 21,12 27,12 29,12 37,12 49,12 57,12 65,12 75,12 77,12 79,12 1.127,12.371 2.921,12.371 8.382,12.452 37.338,12.827 19.812,12.954 83.185,13.335 1.127,13.773 6.731,13.814 8.382,13.814 6,14 44,14 52,14 60,14 68,14 82,14 67.31,14.351 51.054,14.478 59.309,14.478 83.185,14.753 22.352,14.986 38.354,15.113 1.127,15.175 2.921,15.177 5.08,15.177 6.731,15.177 8.382,15.177 7,16 43,16 51,16 59,16 77,16 83.185,16.171 2.921,16.518 66.802,16.51 5.08,16.539 6.731,16.539 8.382,16.539 1.127,16.578 58.801,16.637 45.72,17.018 13.843,17.272 61.722,17.526 83.185,17.589 2.921,17.859 5.08,17.901 6.731,17.901 8.382,17.901 1.127,17.98 6,18 14,18 38,18 76,18 53.848,18.034 45.72,18.161 18.796,18.415 29.464,18.669 69.723,18.796 83.185,19.008 2.921,19.2 5.08,19.264 6.731,19.264 8.382,19.264 1.127,19.383 43.434,19.939 5,20 7,20 83.185,20.426 2.921,20.541 66.548,20.574 5.08,20.626 6.731,20.626 8.382,20.626 77.343,20.701 1.127,20.785 27.813,21.717 83.185,21.844 2.921,21.882 77.343,21.907 5.08,21.988 6,22 6.731,21.988 8.382,21.988 20,22 1.127,22.187 77.343,23.114 2.921,23.224 5.08,23.351 6.731,23.351 8.382,23.351 1.127,23.59 51.308,23.876 59.182,23.876 3,24 5,24 7,24 22.225,24.003 25,24 29.972,24.003 33,24 38.1,24.003 41,24 43.434,24.003 53,24 61,24 69,24 77.343,24.32 77.343,25.527 83.312,25.908 14,26 46,26 54,26 58,26 62,26 70,26 78,26 66.548,26.035 80.391,26.162 69.469,26.416 61.722,26.543 13.97,26.67 45.72,26.797 53.848,26.924 29.464,27.051 27.051,27.178 18.796,27.559 61.722,27.686 22.479,27.94 3,28 5,28 17,28 21,28 49,28 53,28 57,28 61,28 65,28 79,28 83,28 69.85,28.194 79.502,29.21 43.307,29.464 26,30 80,30 27.782,30.361 19.812,30.48 3,32 17,32 25,32 33,32 41,32 49,32 57,32 65,32 81,32 22.225,32.893 77.089,33.147 43.307,33.274 51.308,33.274 27.178,34.798 18.923,34.925 3.318,35.052 69.596,35.687 79.756,35.814 3,36 53,36 61,36 69,36 79,36 14.097,36.068 45.72,36.068 53.848,36.068 61.849,36.068 37.846,36.703 61.849,37.211 69.85,37.592 14,38 26,38 46,38 54,38 62,38 78,38 80,38 7.636,39.116 17,40 19,40 27,40 49,40 57,40 65,40 81,40 30.353,41.656 38.354,41.656 2,42 8,42 78,42 76.962,42.545 51.308,42.672 27.178,43.815 3,44 5,44 7,44 19,44 77,44 5.604,44.069 18.669,44.958 21.59,45.085 14.478,45.212 69.596,45.212 80.01,45.212 45.847,45.466 61.849,45.466 53.721,45.72 14,46 46,46 62,46 70,46 29.718,46.609 61.849,46.609 69.596,46.736 1.27,46.863 3.064,46.863 37.592,46.863 3,48 77,48 9.779,48.121 18.669,48.895 26.67,48.895 9.779,49.671 75.438,50.292 80.518,50.292 9.779,51.222 75.438,51.788 76.962,51.943 3,52 5,52 7,52 59.309,52.07 9.779,52.773 26.797,52.959 75.438,53.284 6,54 8,54 18.669,54.229 9.779,54.323 80.391,54.356 37.973,54.737 75.438,54.779 22.098,54.864 53.848,54.864 61.849,54.864 13.716,55.118 29.972,55.118 45.72,55.118 69.85,55.118 9.779,55.874 3,56 5,56 7,56 13,56 53,56 61,56 75.438,56.275 9.779,57.424 75.438,57.771 6,58 8,58 10,58 12,58 20,58 28,58 52,58 60,58 78,58 26.67,58.166 9.779,58.975 17,60 23,60 25,60 31,60 39,60 47,60 55,60 63,60 75,60 81,60 9.779,60.526 75.438,60.762 76.962,61.341 59.436,61.595 18.796,61.722 12,62 20,62 60,62 78,62 9.779,62.076 75.438,62.258 62.485,62.901 26.67,63.246 37.402,63.428 9.779,63.627 18.923,63.627 69.469,63.627 21.336,63.754 75.438,63.754 12.192,63.881 14.478,63.881 3,64 7,64 17,64 77,64 83,64 78.486,64.163 83.566,64.897 7.493,64.971 62.948,65.236 1.397,65.325 70.739,65.659 78.486,65.659 8,66 54,66 82.313,66.262 83.566,66.262 7.493,66.521 69.977,66.548 1.397,66.951 73.025,67.056 78.486,67.155 40.325,67.461 45.457,67.551 83.566,67.627 82.313,67.646 27.178,67.691 30.776,67.914 35.306,67.945 3,68 83,68 7.493,68.072 1.397,68.577 61.341,68.834 83.566,68.993 82.313,69.03 18.165,69.088 19.685,69.088 80,70 1.397,70.203 83.566,70.358 49.784,70.416 81.06,70.414 82.313,70.414 83.566,71.723 40.005,71.803 64.388,71.811 79.807,71.798 81.06,71.798 82.313,71.798 1.397,71.83 4.826,71.882 6.377,71.882 7.927,71.882 37.563,71.978 3,72 7,72 73,72 79,72 83,72 55.782,72.078 47.371,72.882 83.566,73.088 78.553,73.182 79.807,73.182 81.06,73.182 82.313,73.182 1.397,73.456 73.025,73.66 76.835,73.914 2,74 76,74 80,74 82,74 69.469,74.168 83.566,74.454 78.553,74.566 79.807,74.566 81.06,74.566 82.313,74.566 69.469,74.803 1.397,75.082 83.566,75.819 3,76 5,76 7,76 9,76 69,76 79,76 81,76 83,76 1.397,76.708 34.48,76.906 49.784,76.906 74.803,76.962 2,78 8,78 34.925,79.105 74.549,79.375 9,80 19,80 21,80 23,80 25,80 27,80 31,80 33,80 35,80 71,80 73,80 58.166,80.264 62.904,80.299 27.222,81.802 28.848,81.802 32.1,81.802 33.726,81.802 8,82 10,82 28,82 30,82 76,82 48.335,82.387 49.588,82.387 50.842,82.387 52.095,82.387 53.348,82.387 54.601,82.387 55.854,82.387 57.107,82.387 58.36,82.387 59.614,82.387 60.867,82.387 62.12,82.387 63.373,82.387 73.457,83.439 74.71,83.439 75.963,83.439
GND_BUS: C28.2 C43.2 JP1.3 LED4.2 TVS1.3 TVS2.3 TVS7.2 TVS8.2 U3.5 U9.5 | length 112.7
  Top Layer w0.5: v1(9.906,25.019) 9.906,9.652 11.43,8.128 30.753,8.128 31.536,7.345 v1(31.536,6.731) ; v1(26.416,2.159) 26.746,2.489 TVS7.2@28.109,2.489 ; TVS1.3@32.663,4.989 32.663,5.014 32.863,5.214 33.539,5.214 33.571,5.246 v1(33.571,5.669) ; TVS2.3@38.166,4.989 v1(38.166,5.842) ; v1(42.799,2.286) 43.488,2.286 43.688,2.486 TVS8.2@43.688,2.489
  Mid-Layer 1 w0.5: v1(26.416,2.159) 26.416,3.556 27.178,4.318 33.655,4.318 ; 31.536,4.445 v1(31.536,6.731) ; v1(33.571,5.669) 33.571,4.402 33.655,4.318 ; v1(38.166,5.842) 38.166,4.379 38.227,4.318 ; v1(42.799,2.286) 42.799,3.302 41.783,4.318 38.227,4.318 ; 33.655,4.318 38.227,4.318
  Bottom Layer w0.4: C43.2@2.159,27.231 2.159,26.396 2.393,26.162 7.799,26.162 ; U9.5@8.128,32.1 8.128,30.988 7.799,30.659 7.799,26.162 ; LED4.2@8.759,25.019 8.759,25.777 8.763,25.781 8.382,26.162 7.799,26.162
  Bottom Layer w0.5: U3.5@7.403,50.316 8.231,50.316 8.785,49.762 C28.2@8.785,45.085 9.525,45.085 9.906,44.704 v1(9.906,25.019) LED4.2@8.95,25.019 ; JP1.3@31.503,8.283 31.536,8.25 v1(31.536,6.731)
I_LD_EXT: DIO65.1 DIO66.1 DIO67.1 DIO68.1 Q138.3 | length 45
  Bottom Layer w0.4: Q138.3@76.434,67.006 76.434,65.004 76.2,64.77 76.2,55.597 ; DIO66.1@77.578,27.397 77.565,27.41 76.603,27.41 76.2,27.813 76.2,36.797 ; DIO65.1@77.578,36.797 76.2,36.797 ; DIO68.1@77.578,46.198 76.2,46.198 ; DIO67.1@77.578,55.597 76.2,55.597 ; 76.2,36.797 76.2,46.198 ; 76.2,46.198 76.2,55.597
I_LD_INT: DIO1.1 DIO2.1 DIO3.1 DIO4.1 DIO5.1 DIO6.1 DIO7.1 DIO8.1 DIO9.1 DIO10.1 DIO11.1 DIO12.1 DIO13.1 DIO14.1 DIO15.1 DIO16.1 DIO17.1 DIO18.1 DIO19.1 DIO20.1 DIO21.1 DIO22.1 DIO23.1 DIO24.1 DIO25.1 DIO26.1 DIO27.1 DIO28.1 DIO29.1 DIO30.1 DIO31.1 DIO32.1 DIO33.1 DIO34.1 DIO35.1 DIO36.1 DIO37.1 DIO38.1 DIO39.1 DIO40.1 DIO41.1 DIO42.1 DIO43.1 DIO44.1 DIO45.1 DIO46.1 DIO47.1 DIO48.1 LD1.3 LD2.3 LD3.3 LD4.3 LD5.3 LD6.3 LD7.3 LD8.3 LD9.3 LD10.3 LD11.3 LD12.3 LD13.3 LD14.3 LD15.3 LD16.3 LD17.3 LD18.3 LD19.3 LD20.3 LD21.3 LD22.3 LD23.3 LD24.3 LD25.3 LD26.3 LD27.3 LD28.3 LD29.3 LD30.3 LD31.3 LD32.3 LD33.3 LD34.3 LD35.3 LD36.3 LD37.3 LD38.3 LD39.3 LD40.3 LD41.3 LD42.3 LD43.3 LD44.3 LD45.3 LD46.3 LD47.3 LD48.3 Q1.3 | length 885.3
  Top Layer w0.4: LD48.3@14.5,10.4 LD47.3@22.5,10.4 LD46.3@30.5,10.4 31.242,11.142 31.242,19.812 ; LD40.3@14.5,19.8 15.228,19.8 15.24,19.812 ; LD32.3@14.5,29.2 15.23,29.2 15.24,29.21 ; LD24.3@14.5,38.6 15.232,38.6 15.24,38.608 ; LD16.3@14.5,48 15.234,48 15.24,48.006 ; LD8.3@14.5,57.4 15.24,56.66 15.24,48.006 ; 15.24,10.414 15.24,19.812 ; LD39.3@22.5,19.8 23.229,19.8 23.241,19.812 ; LD31.3@22.5,29.2 23.231,29.2 23.241,29.21 ; LD23.3@22.5,38.6 23.233,38.6 23.241,38.608 ; LD15.3@22.5,48 23.235,48 23.241,48.006 ; LD7.3@22.5,57.4 23.241,56.659 23.241,48.006 ; 23.241,10.414 23.241,19.812 ; LD38.3@30.5,19.8 31.23,19.8 31.242,19.812 ; LD30.3@30.5,29.2 31.232,29.2 31.242,29.21 ; LD22.3@30.5,38.6 31.234,38.6 31.242,38.608 ; LD14.3@30.5,48 31.236,48 31.242,48.006 ; LD6.3@30.5,57.4 31.242,56.658 31.242,48.006 ; LD45.3@38.5,10.4 LD44.3@46.5,10.4 LD43.3@54.5,10.4 LD42.3@62.5,10.4 LD41.3@70.5,10.4 71.247,11.147 71.247,19.812 ; LD37.3@38.5,19.8 39.231,19.8 39.243,19.812 ; LD29.3@38.5,29.2 39.251,29.2 ; LD21.3@38.5,38.6 39.235,38.6 39.243,38.608 ; LD13.3@38.5,48 39.237,48 39.243,48.006 ; LD5.3@38.5,57.4 39.243,56.657 39.243,48.006 ; 39.243,10.414 39.243,19.812 ; LD36.3@46.5,19.8 47.251,19.8 47.263,19.812 ; LD28.3@46.5,29.2 47.253,29.2 47.263,29.21 ; LD20.3@46.5,38.6 47.255,38.6 47.263,38.608 ; LD12.3@46.5,48 47.257,48 47.263,48.006 ; LD4.3@46.5,57.4 47.263,56.637 47.263,48.006 ; 47.263,10.414 47.263,19.812 ; LD35.3@54.5,19.8 55.233,19.8 55.245,19.812 ; LD27.3@54.5,29.2 55.235,29.2 55.245,29.21 ; LD19.3@54.5,38.6 55.237,38.6 55.245,38.608 ; LD11.3@54.5,48 55.239,48 55.245,48.006 ; LD3.3@54.5,57.4 55.245,56.655 55.245,48.006 ; 55.245,10.414 55.245,19.812 ; LD34.3@62.5,19.8 62.512,19.812 63.301,19.812 ; LD26.3@62.5,29.2 63.291,29.2 63.301,29.21 ; LD18.3@62.5,38.6 63.293,38.6 63.301,38.608 ; LD10.3@62.5,48 63.295,48 63.301,48.006 ; LD2.3@62.5,57.4 63.301,56.599 63.301,48.006 ; 63.301,10.414 63.301,19.812 ; LD33.3@70.5,19.8 70.512,19.812 71.247,19.812 ; LD25.3@70.5,29.2 71.237,29.2 71.247,29.21 ; LD17.3@70.5,38.6 71.239,38.6 71.247,38.608 ; LD9.3@70.5,48 71.241,48 71.247,48.006 ; LD1.3@70.5,57.4 71.247,56.653 71.247,48.006 ; 15.24,19.812 15.24,29.21 ; 15.24,29.21 15.24,38.608 ; 15.24,38.608 15.24,48.006 ; 23.241,19.812 23.241,22.479 22.86,22.86 22.86,23.749 23.241,24.13 23.241,29.21 ; 23.241,29.21 23.241,31.623 22.987,31.877 22.987,32.893 23.241,33.147 23.241,38.608 ; 23.241,38.608 23.241,48.006 ; 31.242,19.812 31.242,22.479 30.734,22.987 30.734,24.003 31.242,24.511 31.242,29.21 ; 31.242,29.21 31.242,31.496 30.607,32.131 30.607,33.02 31.242,33.655 31.242,38.608 ; 31.242,38.608 31.242,48.006 ; 39.243,19.812 39.243,22.606 38.735,23.114 38.735,23.749 39.251,24.265 39.251,29.2 ; 39.243,38.608 39.243,48.006 ; 39.243,38.608 39.243,33.147 38.862,32.766 38.862,32.131 39.251,31.742 39.251,29.2 ; 47.263,19.812 47.263,29.21 ; 47.263,29.21 47.263,38.608 ; 47.263,38.608 47.263,48.006 ; 55.245,19.812 55.245,29.21 ; 55.245,29.21 55.245,38.608 ; 55.245,38.608 55.245,48.006 ; 63.301,19.812 63.301,29.21 ; 63.301,29.21 63.301,38.608 ; 63.301,38.608 63.301,48.006 ; 71.247,19.812 71.247,29.21 ; 71.247,29.21 71.247,38.608 ; 71.247,38.608 71.247,48.006
  Mid-Layer 2 w0.4: LD40.3@14.5,19.8 LD39.3@22.5,19.8 LD38.3@30.5,19.8 LD37.3@38.5,19.8 ; LD32.3@14.5,29.2 LD31.3@22.5,29.2 LD30.3@30.5,29.2 LD29.3@38.5,29.2 ; LD24.3@14.5,38.6 LD23.3@22.5,38.6 LD22.3@30.5,38.6 31.27,39.37 34.163,39.37 34.933,38.6 LD21.3@38.5,38.6 ; LD16.3@14.5,48 LD15.3@22.5,48 LD14.3@30.5,48 LD13.3@38.5,48 ; LD7.3@22.5,57.4 LD6.3@30.5,57.4 LD5.3@38.5,57.4 ; LD46.3@30.5,10.4 LD45.3@38.5,10.4 ; LD36.3@46.5,19.8 50.038,19.8 ; LD28.3@46.5,29.2 50.038,29.2 ; LD20.3@46.5,38.6 50.038,38.6 ; LD12.3@46.5,48 50.038,48 ; LD4.3@46.5,57.4 50.038,57.4 ; LD34.3@62.5,19.8 LD35.3@54.5,19.8 50.038,19.8 ; LD26.3@62.5,29.2 LD27.3@54.5,29.2 50.038,29.2 ; LD18.3@62.5,38.6 LD19.3@54.5,38.6 50.038,38.6 ; LD10.3@62.5,48 LD11.3@54.5,48 50.038,48 ; LD2.3@62.5,57.4 LD3.3@54.5,57.4 50.038,57.4 ; 50.038,19.8 50.038,29.2 ; 50.038,29.2 50.038,38.6 ; 50.038,38.6 50.038,48 ; 50.038,48 50.038,57.4
  Mid-Layer 2 w0.5: LD2.3@62.5,57.4 63.496,57.4 64.516,58.42 64.516,64.75 v1(63.226,66.04)
  Bottom Layer w0.4: DIO48.1@11.818,8.597 11.818,9.776 12.442,10.4 LD48.3@14.5,10.4 ; DIO37.1@11.818,17.997 11.818,19.176 12.442,19.8 LD40.3@14.5,19.8 ; DIO28.1@11.818,27.397 11.818,28.576 12.442,29.2 LD32.3@14.5,29.2 ; DIO24.1@11.818,36.797 11.818,37.976 12.442,38.6 LD24.3@14.5,38.6 ; DIO12.1@11.818,46.197 11.818,47.376 12.442,48 LD16.3@14.5,48 ; DIO8.1@11.818,55.597 11.818,56.776 12.442,57.4 LD8.3@14.5,57.4 ; DIO47.1@19.818,11.176 19.973,11.176 20.749,10.4 LD47.3@22.5,10.4 ; DIO40.1@19.818,19.971 19.989,19.8 LD39.3@22.5,19.8 ; DIO29.1@19.818,28.861 22.116,28.861 22.455,29.2 LD31.3@22.5,29.2 ; DIO23.1@19.818,37.624 21.524,37.624 LD23.3@22.5,38.6 ; DIO13.1@19.818,46.514 19.818,47.376 20.442,48 LD15.3@22.5,48 ; DIO7.1@19.818,55.597 19.818,56.776 20.442,57.4 LD7.3@22.5,57.4 ; DIO45.1@27.813,11.176 27.968,11.176 28.744,10.4 LD46.3@30.5,10.4 ; DIO39.1@27.813,19.971 27.984,19.8 LD38.3@30.5,19.8 ; DIO30.1@27.813,28.861 30.08,28.861 30.419,29.2 LD30.3@30.5,29.2 ; DIO14.1@27.813,46.514 27.813,47.371 28.442,48 LD14.3@30.5,48 ; DIO6.1@27.818,55.597 27.818,56.776 28.442,57.4 LD6.3@30.5,57.4 ; DIO22.1@27.918,37.61 29.51,37.61 LD22.3@30.5,38.6 ; DIO44.1@35.818,11.176 35.973,11.176 36.749,10.4 LD45.3@38.5,10.4 ; DIO36.1@35.818,19.971 35.989,19.8 LD37.3@38.5,19.8 ; DIO15.1@35.818,46.514 35.818,47.376 36.442,48 LD13.3@38.5,48 ; DIO5.1@35.818,55.597 35.818,56.776 36.442,57.4 LD5.3@38.5,57.4 ; DIO21.1@35.896,37.624 37.524,37.624 LD21.3@38.5,38.6 ; DIO46.1@43.818,8.597 43.818,9.776 44.442,10.4 LD44.3@46.5,10.4 ; DIO38.1@43.818,17.997 43.818,19.176 44.442,19.8 LD36.3@46.5,19.8 ; DIO32.1@43.818,27.397 43.818,28.576 44.442,29.2 LD28.3@46.5,29.2 ; DIO20.1@43.818,36.797 43.818,37.976 44.442,38.6 LD20.3@46.5,38.6 ; DIO16.1@43.818,46.197 43.818,47.376 44.442,48 LD12.3@46.5,48 ; DIO4.1@43.818,55.597 43.818,56.776 44.442,57.4 LD4.3@46.5,57.4 ; DIO43.1@51.818,8.597 51.818,9.776 52.442,10.4 LD43.3@54.5,10.4 ; DIO35.1@51.818,17.997 51.818,19.176 52.442,19.8 LD35.3@54.5,19.8 ; DIO27.1@51.818,27.397 51.818,28.576 52.442,29.2 LD27.3@54.5,29.2 ; DIO19.1@51.818,36.797 51.818,37.976 52.442,38.6 LD19.3@54.5,38.6 ; DIO17.1@51.818,46.197 51.818,47.376 52.442,48 LD11.3@54.5,48 ; DIO3.1@51.818,55.597 51.818,56.776 52.442,57.4 LD3.3@54.5,57.4 ; DIO42.1@59.818,8.597 59.818,9.776 60.442,10.4 LD42.3@62.5,10.4 ; DIO34.1@59.818,17.997 59.818,19.176 60.442,19.8 LD34.3@62.5,19.8 ; DIO26.1@59.818,27.397 59.818,28.576 60.442,29.2 LD26.3@62.5,29.2 ; DIO10.1@59.818,36.797 59.818,37.976 60.442,38.6 LD18.3@62.5,38.6 ; DIO18.1@59.818,46.197 59.818,47.376 60.442,48 LD10.3@62.5,48 ; DIO2.1@59.818,55.597 59.818,56.776 60.442,57.4 LD2.3@62.5,57.4 ; DIO41.1@67.818,8.597 67.818,9.776 68.442,10.4 LD41.3@70.5,10.4 ; DIO33.1@67.818,17.997 67.818,19.176 68.442,19.8 LD33.3@70.5,19.8 ; DIO25.1@67.818,27.397 67.818,28.576 68.442,29.2 LD25.3@70.5,29.2 ; DIO11.1@67.818,36.797 67.818,37.976 68.442,38.6 LD17.3@70.5,38.6 ; DIO9.1@67.818,46.197 67.818,47.376 68.442,48 LD9.3@70.5,48 ; DIO1.1@67.818,55.597 67.818,56.776 68.442,57.4 LD1.3@70.5,57.4
  Bottom Layer w0.5: DIO31.1@35.918,28.861 38.107,28.861 38.446,29.2 LD29.3@38.5,29.2 ; v1(63.226,66.04) Q1.3@63.226,67.006
I_MO_EXT: C18.2 R305.2 U7.96 | length 51.6
  Top Layer w0.25: U7.96@33.4,69.406 37.021,69.406 38.227,70.612 v1(38.227,72.009)
  Mid-Layer 2 w0.4: v1(38.227,72.009) 38.227,76.513 42.801,81.087 47.515,81.087 48.047,81.619 68.622,81.619 69.193,81.048 v1(70.231,80.01)
  Bottom Layer w0.4: R305.2@66.613,79.121 70.231,79.121 ; v1(70.231,80.01) 70.231,79.121 ; C18.2@71.342,79.122 70.231,79.121
I_MO_INT: C16.2 R304.2 U7.97 | length 35.7
  Top Layer w0.25: U7.97@33.4,68.906 37.664,68.906 38.989,70.231 v1(38.989,72.009)
  Mid-Layer 2 w0.25: v1(38.989,72.009) 38.989,75.692 43.233,79.936 47.997,79.936 48.535,80.475 54.907,80.475 v1(55.118,80.264)
  Bottom Layer w0.4: R304.2@53.886,79.121 R304.2@53.985,79.121 ; R304.2@53.986,79.121 55.118,79.121 ; v1(55.118,80.264) 55.118,79.121 ; C16.2@58.614,79.122 55.118,79.121
LASER_EXT_0: DIO67.2 JP2.2 Q133.2 | length 57.8
  Mid-Layer 2 w0.4: v1(75.091,58.867) v1(78.74,58.867)
  Bottom Layer w0.4: v1(75.091,58.867) 74.536,58.311 74.536,15.634 75.642,14.528 JP2.2@79.247,14.528 ; DIO67.2@77.578,58.867 79.248,58.867 80.045,58.867 80.92,57.992 Q133.2@80.92,56.195
LASER_EXT_1: DIO68.2 JP2.4 Q131.2 | length 45.2
  Mid-Layer 2 w0.4: v1(75.091,49.468) v1(78.74,49.468)
  Bottom Layer w0.4: v1(75.091,49.468) 75.091,18 76.063,17.028 JP2.4@79.247,17.028 ; DIO68.2@77.578,49.468 79.248,49.468 80.045,49.468 80.92,48.593 Q131.2@80.92,46.796
LASER_EXT_2: DIO65.2 JP2.6 Q132.2 | length 32.2
  Mid-Layer 2 w0.4: v1(75.648,40.067) v1(78.74,40.067)
  Bottom Layer w0.4: v1(75.648,40.067) 75.648,20.491 76.611,19.528 JP2.6@79.247,19.528 ; DIO65.2@77.578,40.067 80.045,40.067 80.92,39.192 Q132.2@80.92,37.395
LASER_EXT_3: DIO66.2 JP2.8 Q130.2 | length 12.8
  Bottom Layer w0.4: DIO66.2@77.578,30.667 80.204,30.667 80.92,29.951 Q130.2@80.92,27.995 79.938,27.995 79.248,27.305 79.248,22.029 JP2.8@79.247,22.028